# Altium PCB LAY-90818_A.brd.PcbDoc (part 3 of 6)
Units mil, origin at the board's own origin, x right, y up, seen from the top; angles counter-clockwise.
Board outline 4645.67 x 2165.35 mil, 4 copper layers (TOP, GND, POWER, BOTTOM), stack 60.45 mil thick; 414 components, 348 nets, 1441 pads, 720 vias.
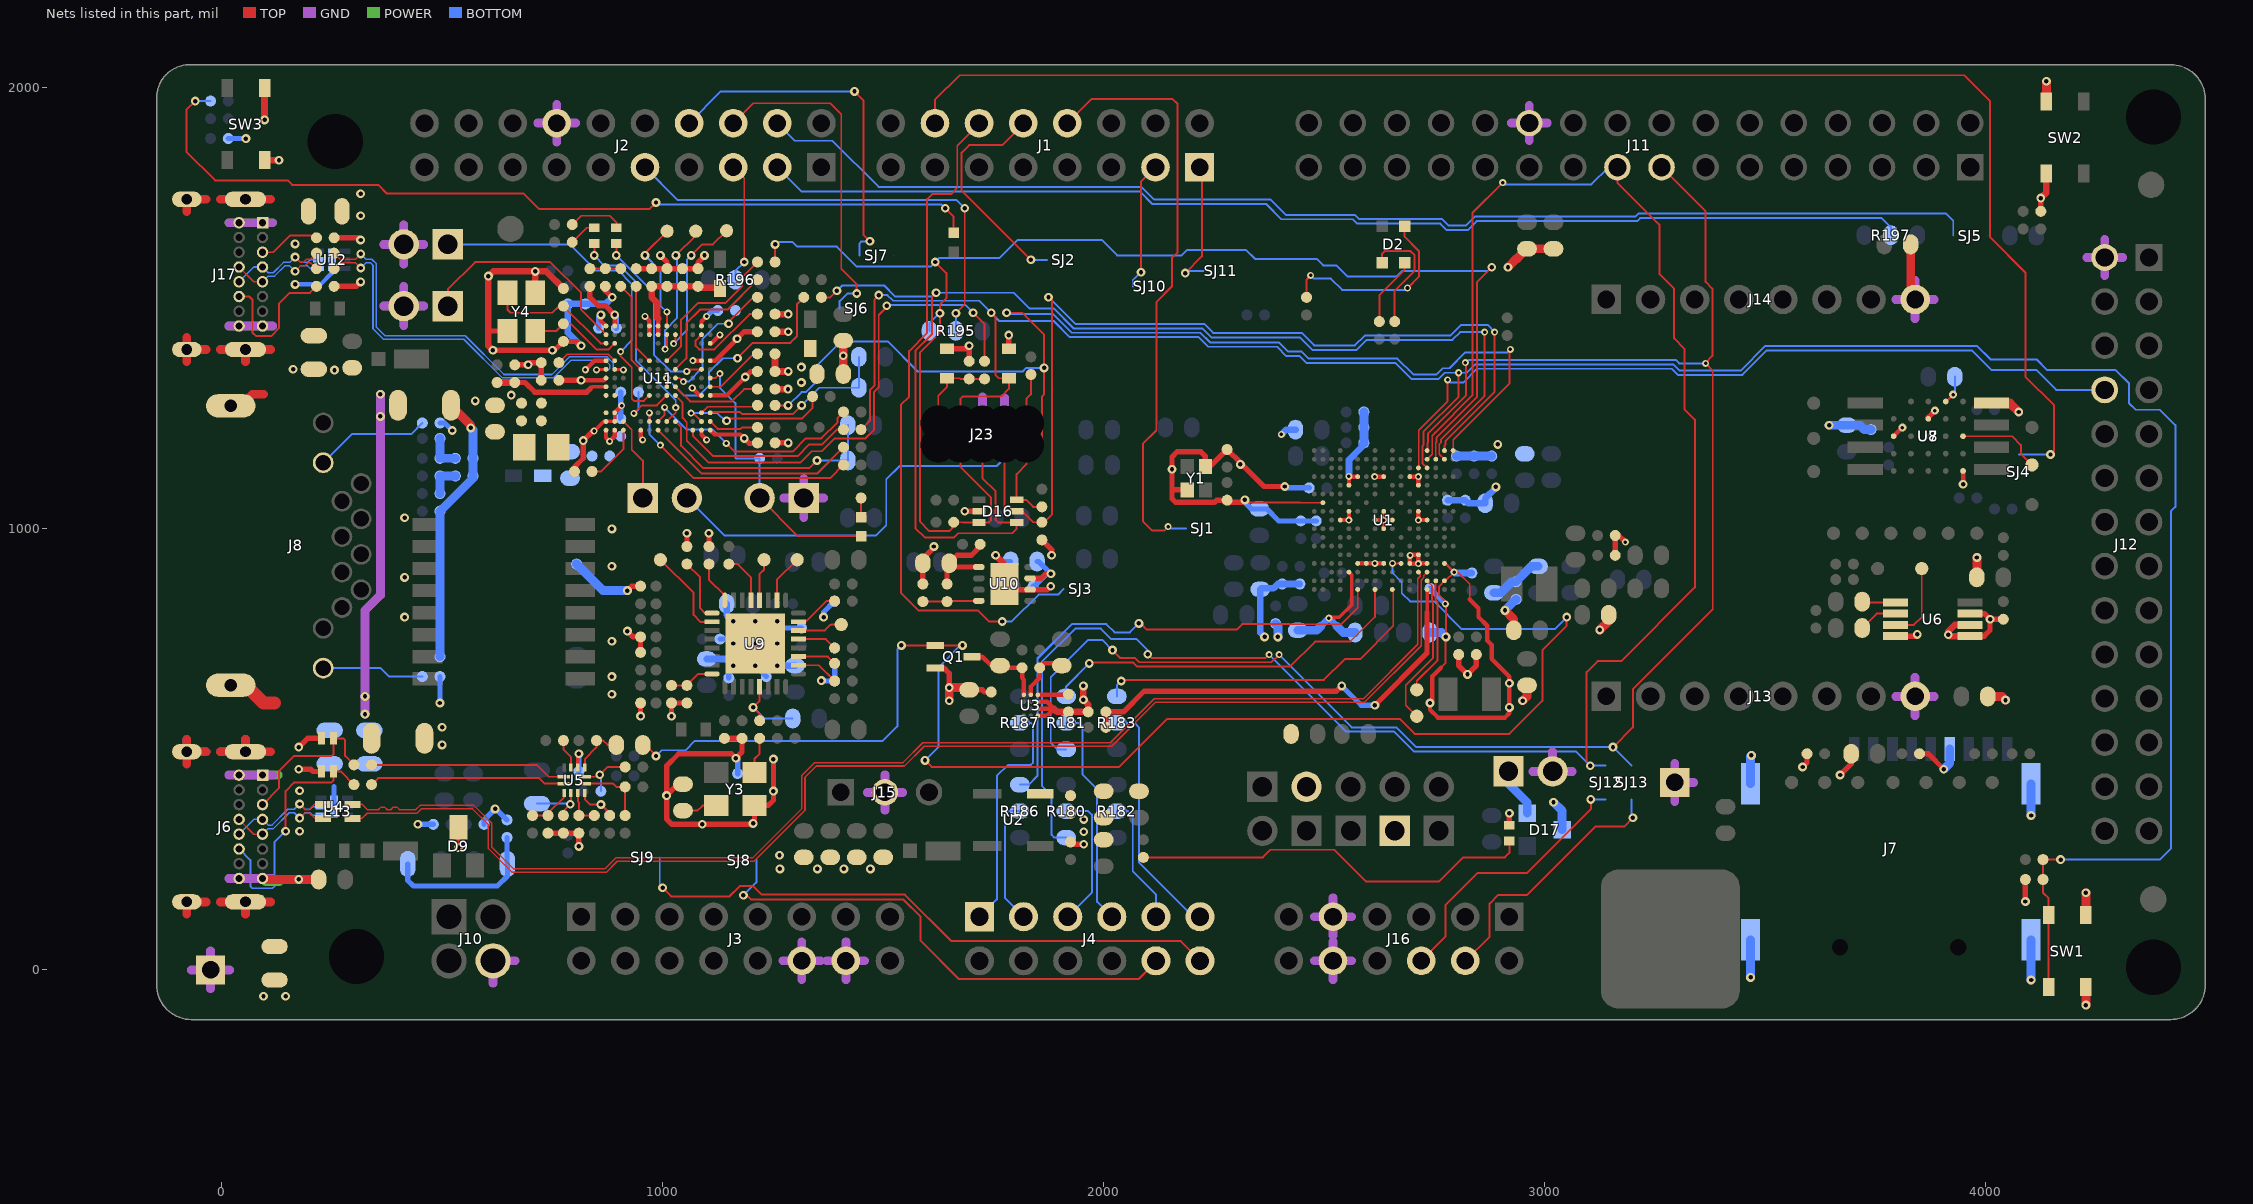
[diagram p5: the nets of this part, all layers, seen from the top]

## Via types
v1: diameter 20, hole 10, TOP to BOTTOM, 483 vias
v2: diameter 16, hole 8, TOP to BOTTOM, 215 vias
v3: diameter 18, hole 8, TOP to BOTTOM, 13 vias
v4: diameter 20, hole 10.1, TOP to BOTTOM, 9 vias

## Nets (pads, with @x,y where several pads share a name; then routed paths per layer and width w, separated by ;. In a path a pad name is that pad's centre, name@x,y a point inside that pad or via, vN(x,y) a via of type N, cw(c..) or ccw(c..) an arc to the next point about the centre after c; other vN are vias at no path point) (continued)
GND: C1.2 C2.2 C3.2 C4.2 C5.2 C6.2 C7.2 C8.2 C9.2 C10.2 C11.2 C12.2 C13.2 C14.2 C15.2 C16.2 C17.2 C18.2 C19.2 C21.2 C22.2 C23.2 C24.2 C27.2 C28.2 C29.2 C30.2 C31.2 C32.2 C33.2 C34.2 C35.2 C36.2 C37.2 C38.2 C39.2 C40.2 C41.2 C42.2 C43.2 C44.2 C45.2 C46.2 C47.2 C48.2 C49.2 C50.2 C51.2 C52.2 C53.2 C54.2 C55.2 C56.2 C57.2 C58.2 C60.2 C62.2 C63.2 C64.2 C65.2 C66.2 C67.2 C68.2 C70.2 C71.2 C72.2 C73.2 C74.2 C75.2 C76.2 C77.2 C78.2 C79.2 C80.2 C81.2 C82.2 C83.2 C84.2 C85.2 C86.2 C87.2 C88.2 C89.2 C90.2 C91.2 C92.2 C93.2 C94.2 C95.2 C96.2 C97.2 C99.2 C100.2 C101.2 C102.1 C103.1 C104.2 C105.2 C106.2 D5.C D7.1 D8.1 D9.3 D14.A D15.A D16.2 J2.14 J3.12 J3.14 J6.A1 J6.A12 J6.B1 J6.B12 J7.6 J7.G1 J7.G2 J7.G3 J7.G4 J10.4 J11.22 J12.2 J13.8 J14.8 J15.2 J16.9 J16.10 J17.A1 J17.A12 J17.B1 J17.B12 J18.2 J19.2 J21.1 J23.3 J23.5 JP1.1 JP2.1 JP6.2 Q1.1 R12.1 R21.2 R29.2 R33.2 R49.2 R50.2 R54.2 R66.2 R67.2 R68.2 R69.2 R82.2 R87.2 R88.2 R89.2 R90.2 R95.1 R96.1 R103.2 R107.2 R112.2 R113.2 R117.2 R118.2 R119.2 R120.2 R121.2 R122.2 R123.2 R135.2 R147.2 R154.2 R192.1 R193.1 R205.2 SW1.1 SW1.2 SW2.1 SW2.2 SW3.1 SW3.2 U1.D6 U1.D9 U1.D12 U1.E5 U1.E13 U1.G2 U1.H5 U1.H9 U1.H13 U1.J4 U1.J8 U1.J10 U1.J14 U1.K9 U1.N13 U1.P6 U1.P7 U1.P9 U1.P12 U1.P14 U1.P16 U1.T16 U2.2 U3.B3 U3.C3 U3.D3 U4.7 U5.10 U6.4 U6.5 U6.6 U6.7 U7.B3 U7.C1 U7.E5 U8.4 U9.33 U10.2 U10.9 U11.B1 U11.B5 U11.B9 U11.B13 U11.H1 U11.H2 U11.J13 U11.M11 U11.M12 U11.N1 U11.N5 U11.N12 U12.7 Y1.2 Y1.4 Y3.2 Y4.2 Y4.4 | length 15083.5
  TOP w4: 2445,1059.37 U1.G2@2497.2,1059.37 ; U1.T16@2772.8,882.2 2760.63,870 2760.63,849.37 2775,835 v2(2775,830) ; v2(2794.48,901.89) 2803.11,901.89 2830,875 2830,840
  TOP w4.4: v1(2320.4,1065.7) 2326.73,1059.37 2445,1059.37 ; 2764.91,685.22 2775,695.31 2775,749 2776,750 v1(2776,754.89) 2776,829 v2(2775,830) ; U1.T16@2772.8,882.2 2774.79,882.2 v2(2794.48,901.89)
  TOP w6: U1.P16@2772.8,921.57 2774.8,921.57 v2(2794.48,901.89)
  TOP w8: U5.10@807.87,458.54 807.87,487.87 v1(810,490) ; v2(844.68,1221.87) 866.28,1243.48 U11.N12@871.59,1243.48 U11.M12@891.28,1243.48 U11.M11@891.28,1263.16
  TOP w10: v2(825,1360.7) 845.57,1381.27 U11.N5@871.59,1381.27 ; v1(860,1485) 860,1471.55 871.54,1460.01 U11.N1@871.59,1460.01 ; U11.M11@891.28,1263.16 891.28,1263.47 v2(907.18,1279.37) ; U11.J13@950.33,1223.79 950.33,1206.22 v2(954.68,1201.87) ; v2(959.98,1481.87) 970.02,1471.83 U11.H1@970.02,1460.01 U11.H2@970.02,1440.33 ; v2(1067.18,1319.37) 1084.02,1302.53 U11.B9@1088.13,1302.53 ; v2(1068.58,1381.27) U11.B5@1088.13,1381.27 ; U11.B13@1088.13,1223.79 1088.13,1213.42 v2(1099.68,1201.87) ; U11.B1@1088.13,1460.01 1088.13,1470.32 v2(1099.68,1481.87) ; U3.D3@1850.75,576.38 1872.13,576.38 1887.64,591.89 ; U3.C3@1850.75,592.13 1850.99,591.89 1887.64,591.89 ; U3.B3@1850.75,607.87 1872.13,607.87 1887.64,592.36 1887.64,591.89 ; U1.J4@2536.57,1020 v2(2556.26,1020) U1.H5@2556.26,1039.69 ; U1.E5@2556.26,1098.74 v2(2556.26,1118.74) 2556.57,1118.43 U1.D6@2575.94,1118.43 ; U1.P6@2575.94,921.57 U1.P7@2595.63,921.57 v2(2615,921.57) U1.P9@2635,921.57 ; v2(2614.23,1118.43) U1.D9@2635,1118.43 ; U1.J8@2615.31,1020 v2(2635,1020) ; U1.K9@2635,1000.31 v2(2635,1020) ; U1.H9@2635,1039.69 v2(2635,1020) ; U1.J10@2654.69,1020 v2(2635,1020) ; U1.D12@2694.06,1118.43 2710.31,1118.43 2710.5,1118.24 v2(2713.74,1118.24) U1.E13@2713.74,1098.74 ; U1.H13@2713.74,1039.69 v2(2713.74,1020) U1.J14@2733.43,1020 ; U1.P14@2733.43,921.57 2714.05,921.57 v2(2713.74,921.26) ; 2764.91,685.22 2745,665.31 2745,610 v1(2740,605) 2740,590 2757.91,572.09 2910,572.09 2920,582.09 v1(2920,595) v1(2920,650) 2920,665 2880,705 2880,736.83 2870,746.83 2870,780 2850,800 2850,820 2830,840 ; U7.C1@3791.26,1210 v3(3810.94,1229.69) ; v1(3948.74,1101.26) U7.E5@3948.74,1131.26 ; v2(2713.74,921.26) 2694.37,921.26 U1.P12@2694.06,921.57 2694.06,939.1 v2(2695,940.05) 2696.22,941.26 U1.N13@2713.74,941.26 v2(2713.74,921.26)
  TOP w12: v1(175,455) 202.22,455 207.22,450 D7.1@226.22,450 ; v1(175,505) 195,525 D8.1@226.22,525 ; R113.2@255,1550 305,1550 v1(315,1560) ; R112.2@255,1660 310,1660 v1(315,1655) ; v1(537,277) D9.3@537,323.3 ; 605,1450 606.4,1448.6 Y4.2@648.21,1448.6 ; v1(615,1405) v1(750,1405) 755,1405 C96.2@775,1425 805,1425 v1(815,1415) ; R107.2@664.7,1371.9 v1(695,1371.9) 700,1376.9 R122.2@724.7,1376.9 C79.2@724.7,1336.9 ; R50.2@740,310 C40.2@775,310 R49.2@810,310 v1(810,280) ; R117.2@800,1130 800,1140 820,1160 v1(820,1200) 841.87,1221.87 v2(844.68,1221.87) ; C85.2@870,1550 870,1540 885,1524.99 v1(885.65,1524.99) ; v1(920,768) 933,755 C54.2@950,755 C57.2@950,720 ; v1(920,860) 930,870 C55.2@950,870 ; R123.2@940,1590 C88.2@975,1590 C87.2@1010,1590 ; v1(950,575.5) C56.2@950,605 ; v1(995,1620) 1010,1605 C87.2@1010,1590 ; v1(1020,575) R87.2@1020,605 C63.2@1055,605 ; R154.2@1046,421 1035,421 v1(1009,395) ; R68.2@1055,960 v1(1055,990) ; v1(1095,1620) 1095,1618.89 1080,1603.89 C89.2@1080,1590 C86.2@1045,1590 C87.2@1010,1590 ; R67.2@1105,960 v1(1105,990) ; R96.1@1140,525 R95.1@1180,525 1180,494 v1(1166,480) 1156,490 1036.51,490 1009,462.49 v1(1009,395) ; v1(1251.16,478) v1(1251.16,405.39) 1251.16,384.6 1239.16,372.6 Y3.2@1208.31,372.6 1208.31,335.4 v1(1205,332.1) 1202.9,330 v1(1090,330) 1021,330 1009,342 v1(1009,395) ; C77.2@1255,1195 v1(1285,1195) ; R103.2@1590,875 C64.2@1590,922 1590,932.89 1615,957.89 v1(1615,960) ; Q1.1@1618.27,684.41 1638,684.41 1650,672.41 v1(1650,640) ; D14.A@1645,1408.46 1688.46,1408.46 v1(1695,1415) R135.2@1695,1380 ; v1(1685,1040) D16.2@1717.28,1040 ; C37.2@1695,635 1725,635 1730,630 C38.2@1745,630 ; U10.9@1775,875 1787.8,862.21 U10.2@1833.07,862.21 1872.2,862.21 v1(1880,870) ; D15.A@1785,1408.46 v1(1785,1439.3) ; R147.2@1860,975 1882,953 v1(1882,940) ; C34.2@1925,290 1930,285 v1(1955,285) ; Y1.2@2189.33,1088.42 2156.57,1088.42 2155,1090 ; v1(2320.4,1065.7) 2314.7,1060 2285,1060 C2.2@2280,1065 2256.5,1065 2251.5,1060 2163.49,1060 2155,1068.49 2155,1090 ; v1(2410.66,1096) 2364,1096 2313.89,1146.11 v1(2310,1146.11) 2310,1150 C1.2@2280,1180 2241.57,1141.58 Y1.4@2230.67,1141.58 2230.67,1164.33 2220,1175 2167,1175 2155,1163 v1(2155,1135) 2155,1090 ; C100.2@2805,715 2805,690 v1(2825,670) 2845,690 C101.2@2845,715 ; D5.C@2920,327.72 v1(2920,355) ; C32.2@3160,940 C24.2@3160,985 3168.05,985 v2(3183.05,970) ; v1(3585,460) 3595,470 R54.2@3595,490 ; v1(3670,441.8) 3695,466.8 C42.2@3695,490 ; U6.4@3795.35,756.61 3840.91,756.61 v1(3845,760.7) ; C43.2@3850,490 3870,490 v1(3905,455) ; U7.B3@3870,1249.37 3870,1253 v3(3885,1268) ; U6.5@3964.65,756.61 3996.61,756.61 4010,770 v1(4010,795) ; U6.7@3964.65,807.79 3997.2,807.79 v1(4010,795) ; C44.2@4040,795 v1(4010,795) ; v1(4090,155) C3.2@4090,205 ; C4.2@4125,1720 v1(4125,1750)
  TOP w15: SW3.2@97.32,1835.94 v1(130,1835.94) ; v1(97.32,1927.32) SW3.1@97.32,1999.33 ; v1(615,1405) 605,1415 605,1450 v1(605,1573) 615.8,1583.8 v1(711.2,1583.8) ; Y4.4@711.2,1535.21 v1(711.2,1583.8) ; C97.2@775,1545 736.2,1583.8 v1(711.2,1583.8) ; R118.2@1254.7,1316.9 v1(1284.2,1316.9) ; R119.2@1254.7,1396.9 C80.2@1254.7,1356.9 v1(1284.7,1356.9) ; C76.2@1254.7,1446.9 v1(1284.7,1446.9) ; R120.2@1254.7,1486.9 v1(1284.7,1486.9) ; v1(1755,940) 1775,920 U10.9@1775,875 ; 1887.64,591.89 1894.53,585 R33.2@1920,585 R29.2@1965,585 1965,601.51 v1(1954.1,612.41) v1(1954.1,643.91) ; U6.5@3964.65,756.61 3918.39,756.61 v1(3915,760) 3915,767.2 3930,782.21 U6.6@3964.65,782.21 ; v1(4125,1750) 4137.68,1762.68 SW2.1@4137.68,1805.67
  TOP w20: J6.A12@92.72,207.23 94.94,205 v1(175,205) C39.2@220,205 ; C83.2@1409.7,1426.9 v1(1409.7,1392.4) 1409.7,1355.3 1410,1355 C84.2@1410,1351 ; v1(1650,610) v1(1650,640) 1690,640 C37.2@1695,635 ; v1(2910,815) 2930,795 C28.2@2930,770 ; v1(2916.8,1593.2) 2936.8,1613.2 2938.2,1613.2 C104.2@2960,1635 C105.2@3020,1635 ; v1(3125,770.86) 3145,790.86 C27.2@3145,805 ; C71.2@3830,1645 3830,1530.15 J14.8@3840.04,1520.11 ; C45.2@3980,890 v1(3980,935) ; C70.2@4005,620 4036.77,620 v1(4045,611.77) ; U8.4@4013,1285 4055,1285 v1(4075,1265) ; SW2.2@4137.68,1969.06 v1(4137.68,2015) ; v1(4227.32,-80) SW1.2@4227.32,-39.05 ; SW1.1@4227.32,124.33 v1(4227.32,175)
  GND w20: -68,0 JP1.1@-25,0 ; -25,-43 JP1.1@-25,0 ; -25,43 JP1.1@-25,0 ; 16.56,207.23 J6.B1@39.57,207.23 62.57,207.23 ; 16.56,441.48 J6.B12@39.57,441.48 62.57,441.48 ; 16.56,1459.87 J17.B1@39.57,1459.87 62.57,1459.87 ; 16.56,1694.12 J17.B12@39.57,1694.12 62.57,1694.12 ; 18,0 JP1.1@-25,0 ; 69.71,207.23 J6.A12@92.72,207.23 115.72,207.23 ; 69.71,441.48 J6.A1@92.72,441.48 115.72,441.48 ; 69.71,1459.87 J17.A12@92.72,1459.87 115.72,1459.87 ; 69.71,1694.12 J17.A1@92.72,1694.12 115.72,1694.12 ; 368.5,1505 J19.2@413,1505 ; 368.5,1645 J18.2@413,1645 ; 413,1460.5 J19.2@413,1505 ; 413,1549.5 J19.2@413,1505 ; 413,1600.5 J18.2@413,1645 ; 413,1689.5 J18.2@413,1645 ; 457.5,1505 J19.2@413,1505 ; 457.5,1645 J18.2@413,1645 ; 615.5,-29.5 J10.4@615.5,20.5 665.5,20.5 ; 717.5,1920 J2.14@760,1920 ; 760,1877.5 J2.14@760,1920 ; 760,1962.5 J2.14@760,1920 ; 802.5,1920 J2.14@760,1920 ; 1273,20.5 J3.12@1315.5,20.5 ; 1275.5,1070 J21.1@1320,1070 ; 1315.5,-22 J3.12@1315.5,20.5 ; 1315.5,63 J3.12@1315.5,20.5 ; 1320,1025.5 J21.1@1320,1070 ; 1320,1114.5 J21.1@1320,1070 ; 1358,20.5 J3.12@1315.5,20.5 ; 1364.5,1070 J21.1@1320,1070 ; 1373,20.5 J3.14@1415.5,20.5 ; 1415.5,-22 J3.14@1415.5,20.5 ; 1415.5,63 J3.14@1415.5,20.5 ; 1458,20.5 J3.14@1415.5,20.5 ; 1464,402.5 J15.2@1504,402.5 ; 1504,362.5 J15.2@1504,402.5 ; 1504,442.5 J15.2@1504,402.5 ; 1544,402.5 J15.2@1504,402.5 ; J23.5@1725,1240 1725,1299 ; J23.3@1775,1240 1775,1297 ; 2477.5,20.5 J16.10@2520,20.5 ; 2477.5,120.5 J16.9@2520,120.5 ; 2520,-22 J16.10@2520,20.5 ; 2520,63 J16.10@2520,20.5 ; 2520,78 J16.9@2520,120.5 ; 2520,163 J16.9@2520,120.5 ; 2562.5,20.5 J16.10@2520,20.5 ; 2562.5,120.5 J16.9@2520,120.5 ; 2925,1920 J11.22@2965,1920 ; 2965,1880 J11.22@2965,1920 ; 2965,1960 J11.22@2965,1920 ; 2973.5,450 JP6.2@3018,450 ; 3005,1920 J11.22@2965,1920 ; 3018,494.5 JP6.2@3018,450 ; 3062.5,450 JP6.2@3018,450 ; 3295,382 JP2.1@3295,425 ; 3295,468 JP2.1@3295,425 ; 3338,425 JP2.1@3295,425 ; 3796.54,620.11 J13.8@3840.04,620.11 ; 3796.54,1520.11 J14.8@3840.04,1520.11 ; 3840.04,576.6 J13.8@3840.04,620.11 ; 3840.04,663.61 J13.8@3840.04,620.11 ; 3840.04,1476.6 J14.8@3840.04,1520.11 ; 3840.04,1563.61 J14.8@3840.04,1520.11 ; 3883.55,620.11 J13.8@3840.04,620.11 ; 3883.55,1520.11 J14.8@3840.04,1520.11 ; 4229.5,1615.24 J12.2@4270,1615.24 ; 4270,1574.73 J12.2@4270,1615.24 ; 4270,1655.74 J12.2@4270,1615.24 ; 4310.5,1615.24 J12.2@4270,1615.24
  POWER w20: 16.56,1459.87 J17.B1@39.57,1459.87 62.57,1459.87 ; 16.56,1694.12 J17.B12@39.57,1694.12 62.57,1694.12 ; J6.B1@39.57,207.23 J6.A12@92.72,207.23 99.94,200 130,200 ; J6.B12@39.57,441.48 J6.A1@92.72,441.48 128.52,441.48 ; 69.71,1459.87 J17.A12@92.72,1459.87 115.72,1459.87 ; 69.71,1694.12 J17.A1@92.72,1694.12 115.72,1694.12 ; 368.5,1505 J19.2@413,1505 ; 368.5,1645 J18.2@413,1645 ; 413,1460.5 J19.2@413,1505 ; 413,1549.5 J19.2@413,1505 ; 413,1600.5 J18.2@413,1645 ; 413,1689.5 J18.2@413,1645 ; 457.5,1505 J19.2@413,1505 ; 457.5,1645 J18.2@413,1645
  BOTTOM w10: v1(166.68,1554.16) 224.16,1554.16 250,1580
  BOTTOM w12: C5.2@15,1885 v1(55,1885) ; 250,1580 U12.7@250,1610 ; U4.7@255,370 255,415 ; v1(445,330) C66.2@480,330 ; v1(495,605) R69.2@495,665 ; R66.2@495,1240 506,1240 v1(523,1223) ; C68.2@595,330 595,340 v1(620,365) 622,365 C67.2@647,340 ; C41.2@810,450 v1(810,490) ; C81.2@855,1455 855,1480 v1(860,1485) ; C94.2@905,1250 905,1277.19 v2(907.18,1279.37) 905,1281.55 R121.2@905,1310 ; v2(1099.68,1481.87) 1112.81,1495 C82.2@1125,1495 ; C52.2@1130,750 1150,750 v4(1160,740) ; C51.2@1150,662 1150,680 v4(1160,690) ; v1(1166,480) 1170,476 C58.2@1170,445 ; v4(1210,690) C48.2@1235,665 ; v4(1260,790) 1275,775 C53.2@1315,775 ; v1(1360,655.81) 1364.19,655.81 1365,655 R90.2@1390,655 R88.2@1390,695 ; v1(1365,800) 1365,811 R89.2@1390,836 ; v1(1755,940) 1769,926 C65.2@1789,926 ; v1(2320.4,1065.7) 2320.4,1059.6 2335,1045 C10.2@2353,1045 2370,1045 2397,1018 C12.2@2447,1018 C11.2@2482,1018 ; v1(2410.66,1096) 2413.66,1093 C30.2@2466,1093 ; C29.2@2740,865 v2(2775,830)
  BOTTOM w15: v1(815,1415) 785,1445 C106.2@785,1510 R205.2@825,1510 870.66,1510 v1(885.65,1524.99) ; C50.2@1100,705 1145,705 v4(1160,690) ; C62.2@1145,830 1145,805 v4(1160,790) ; v4(1260,690) C49.2@1300,690 ; v1(2365,755) 2355,765 C17.2@2355,863 2357,865 2385,865 2395,875 C19.2@2405,875 C18.2@2445,875 ; v2(2403,1214) 2414,1225 C13.2@2435,1225 ; v2(2556.26,1118.74) 2556.26,1156.26 2585,1185 2585,1190 C15.2@2590,1195 ; C23.2@2780,1065 C22.2@2820,1065 2827,1058 C21.2@2865,1058 2865,1068.61 2889.5,1093.1 v1(2889.5,1095) ; v2(2794.48,901.89) 2796.37,900 C31.2@2835,900
  BOTTOM w20: C99.2@805,920 865,860 v1(920,860) ; C15.2@2590,1195 C14.2@2590,1230 C16.2@2590,1265 ; R12.1@2740,765 2765.89,765 v1(2776,754.89) ; C9.2@2800,1165 C8.2@2840,1165 C7.2@2880,1165 ; v1(2910,815) R21.2@2935,840 ; v1(3467.09,-17.09) J7.G4@3467.09,67.87 ; J7.G2@3467.09,422.2 3467.09,484.48 v1(3468.8,486.2) ; v1(3645,1235) C46.2@3685,1235 3715,1235 3725,1225 C47.2@3740,1225 ; v1(3905,455) 3918.66,468.66 J7.6@3918.66,500.94 ; v1(4102.91,-22.91) J7.G3@4102.91,67.87 ; v1(4102.91,350) J7.G1@4102.91,422.2
  other v1: 95,-60 145,-60 1266,228.93 1351,228.93 1411,228.93 1471,228.93 1265,260 1955,313 176.68,314.16 1955,341 176.68,406.16 500,510 500,550 885,625 885,665 885,745 415,800 415,890 885,915 885,1000 415,1025 2893.5,1191.6 575,1290 656.92,1303.38 256,1360 162,1362 166.68,1646.16 315,1710 315,1760
  other v4: 1210,740 1260,740 1210,790
GND_ENET: C60.1 C61.2 J8.S1 J8.S2 R82.1 | length 940.4
  TOP w20: J8.S2@20.9,1278.78 43.78,1278.78 70,1305 95,1305
  TOP w30: J8.S1@20.9,645.71 54.29,645.71 95,605 120,605
  GND w20: v1(325,580) v1(325,620) 325,815 360,850 v1(360,1255) v1(360,1305)
HS_USB_CC1: D8.2 J6.A5 R48.1 | length 358.5
  TOP w4.4: J6.A5@92.72,374.55 130,411.84 130,450 165,485 249.38,485 253.78,489.4 D8.2@253.78,525 275.6,525 280,520.6 280,485 R48.1@300,465
HS_USB_CC2: D7.2 J6.B5 R47.1 | length 578.3
  TOP w4.4: v1(145.18,314.16) 145.18,405.18 165,425 249.38,425 253.78,429.4 D7.2@253.78,450 270,450 R47.1@300,420
  BOTTOM w4.4: J6.B5@39.57,274.16 65,248.72 65,189.4 69.4,185 115,185 120,190 120,290 144.16,314.16 v1(145.18,314.16)
HS_USB_DN: J6.A7 J6.B7 L13.1 U4.1 | length 294.8
  TOP w3.5: J6.B7@39.57,341.09 73.03,307.62 J6.A7@92.72,307.62 ; v1(176.68,344.16) 187.87,355.35 199.65,355.35 211.5,343.5 L13.1@230,343.5
  BOTTOM w3.5: J6.A7@92.72,307.62 105.55,320.45 117.48,320.45 153.23,356.2 164.64,356.2 v1(176.68,344.16) 188.78,356.26 199.89,356.26 205.83,350.31 U4.1@225.08,350.31
HS_USB_DP: J6.A6 J6.B6 L13.4 U4.2 | length 295.6
  TOP w3.5: v1(176.68,376.16) 189.68,363.15 198.15,363.15 210,375 L13.4@230,375
  BOTTOM w3.5: J6.B6@39.57,307.62 73.03,341.09 J6.A6@92.72,341.09 105.55,328.25 114.25,328.25 150,364 164.52,364 v1(176.68,376.16) 188.78,364.06 199.89,364.06 205.83,370 U4.2@225.08,370
HS_USB_ID: Q1.2 R44.2 U1.P11 | length 3464.1
  TOP w4: v2(2655,921.57) U1.P11@2674.37,921.57
  TOP w4.4: R44.2@955,510 960,510 v1(985,485) ; v1(1541.33,735.59) Q1.2@1618.27,735.59 v1(1680,735.59) ; v1(1595,475) 1610,460 2035,460 2144.05,569.05 2670.95,569.05 2705,535 2920,535 2995,610 2995,725 3050,780 v1(3050,800)
  BOTTOM w4: v2(2655,921.57) 2655,900 2676,879
  BOTTOM w4.4: v1(985,485) 998,498 1052,498 1073.1,519.1 1499.1,519.1 1532.16,552.16 1532.16,726.42 v1(1541.33,735.59) ; v1(1595,475) 1626,506 1626,686.59 1675,735.59 v1(1680,735.59) ; 2676,879 2676,854 2694.7,835.3 2749.62,835.3 2812.42,772.5 3022.5,772.5 v1(3050,800)
LDO_3V3: C35.1 C36.1 R25.1 U2.5
LPC_DBGIF_DETECT: R134.1 U11.E9 | length 1206.9
  TOP w4.4: U11.E9@1029.07,1302.53 1045.18,1286.42 1045.18,1251.38 1054.68,1241.87 1054.68,1200.19 1104.88,1150 1312,1150 1338,1176 1361,1176 1390,1205 1460,1205 1479.7,1224.7 1479.7,1310.56 1490,1320.86 1490,1484.9 1508.12,1503.02 v1(1508.12,1505.83) ; v1(1704,1490) 1730,1464 R134.1@1730,1380
  BOTTOM w4.4: v1(1508.12,1505.83) 1510.93,1505.83 1512.3,1507.2 1686.8,1507.2 v1(1704,1490)
LPC_DBGIF_ISP0_CTRL: R133.1 U11.C13 | length 398.1
  TOP w4.4: U11.C13@1068.44,1223.79 1068.44,1211.19 1114.63,1165 1305.86,1165 1331.71,1190.86 1360.86,1190.86 1395,1225 R133.1@1410,1225
LPC_DBGIF_RESET: R132.1 U11.E6 | length 316.9
  TOP w4.4: U11.E6@1029.07,1361.59 1053.99,1386.51 1053.99,1466.21 1085.15,1497.37 1147.37,1497.37 R132.1@1215,1565
LPC_DBGIF_TCK_SWCLK: J22.1 U11.L12 | length 191.7
  TOP w4.4: U11.L12@910.96,1243.48 930,1224.44 930,1179.74 955,1154.74 J22.1@955,1070
LPC_DBGIF_TDI: R131.1 U11.F5 | length 345.3
  TOP w4.4: U11.F5@1009.39,1381.27 1042.07,1413.95 1042.07,1474.26 1079.7,1511.89 1141.88,1511.89 1180,1550 1180,1570 R131.1@1215,1605
LPC_DBGIF_TDO_SWO: R130.1 U11.F8 | length 499.2
  TOP w4.4: U11.F8@1009.39,1322.22 v2(1009.38,1341.67) ; v1(1169.68,1386.87) 1204.68,1421.87 1289.68,1421.87 1304.68,1436.87 1304.68,1509.68 R130.1@1320,1525
  BOTTOM w4.4: v2(1009.38,1341.67) 1049.18,1301.87 1081.87,1301.87 1105,1325 1105,1355 1136.87,1386.87 v1(1169.68,1386.87)
LPC_DBGIF_TMS_SWDIO: R129.1 U11.B11 | length 133.8
  TOP w4.4: U11.B11@1088.13,1263.16 1101.82,1276.86 1211.86,1276.86 R129.1@1215,1280
LPC_HW_VER_0: R118.1 U11.E8 | length 211
  TOP w4.4: U11.E8@1029.07,1322.22 1062.32,1288.97 1156.78,1288.97 1184.72,1316.9 R118.1@1214.7,1316.9
LPC_HW_VER_1: R119.1 U11.A8 | length 137.8
  TOP w4.4: U11.A8@1107.81,1322.22 1132.22,1322.22 1206.9,1396.9 R119.1@1214.7,1396.9
LPC_HW_VER_2: R121.1 U11.F9 | length 144.5
  TOP w4.4: v2(935,1262) 953,1280 965,1280 986.85,1280 U11.F9@1009.39,1302.53
  BOTTOM w4.4: v2(935,1262) 937,1262 945,1270 R121.1@945,1310
LPC_HW_VER_3: R120.1 U11.B2 | length 207.5
  TOP w4.4: U11.B2@1088.13,1440.33 1074.72,1426.92 1074.72,1426.33 1074.63,1426.22 1074.63,1415.02 1082.72,1406.92 1117.35,1406.92 1197.33,1486.9 R120.1@1214.7,1486.9
LPC_HW_VER_4: R122.1 U11.M5 | length 140.5
  TOP w4.4: R122.1@764.7,1376.9 783.67,1395.87 876.68,1395.87 U11.M5@891.28,1381.27
LPC_HW_VER_5: R123.1 U11.H5 | length 181.6
  TOP w4.4: R123.1@940,1550 939.43,1549.43 939.43,1411.86 U11.H5@970.02,1381.27
LPC_HW_VER_6: J18.1 U11.H9 | length 782.6
  TOP w4.4: v2(904.68,1401.87) 904.68,1391.88 930,1366.56 930,1295 935,1290 957.48,1290 U11.H9@970.02,1302.53
  BOTTOM w4.4: J18.1@513,1645 789,1645 848,1586 899.12,1586 930,1555.12 930,1427.19 v2(904.68,1401.87)
LPC_HW_VER_7: J19.1 U11.N2 | length 512.8
  TOP w4.4: J19.1@513,1505 513,1543 575,1604.99 745,1604.99 815,1535 815,1496.92 U11.N2@871.59,1440.33
LPC_HW_VER_8: R117.1 U11.L13 | length 134.9
  TOP w4.4: R117.1@840,1130 860,1130 910.96,1180.96 U11.L13@910.96,1223.79
LPC_LED_USB_COMM: D10.C U11.F12 | length 508.8
  TOP w4.4: v1(845,1620) D10.C@845,1647.28 ; U11.F12@1009.39,1243.48 1029.68,1263.77 v2(1029.68,1275)
  BOTTOM w4: 979.68,1341.87 1029.68,1291.87 v2(1029.68,1275)
  BOTTOM w4.4: v1(845,1620) 868,1597 902.26,1597 940,1559.26 940,1381.56 979.68,1341.87
LPC_LED_VCOM_ACT: D12.C U11.B6 | length 413.4
  TOP w4.4: v1(895,1620) D12.C@895,1647.28 ; v2(1054.68,1356.87) 1059.39,1361.59 U11.B6@1088.13,1361.59
  BOTTOM w4.4: v1(895,1620) 980,1535 980,1395 1018.13,1356.87 v2(1054.68,1356.87)
LPC_MCU_LINK_I2C0_SCL: R143.1 U11.A12 | length 115.4
  TOP w4.4: U11.A12@1107.81,1243.48 1124.49,1226.8 1176.8,1226.8 1180,1230 R143.1@1215,1230
LPC_MCU_LINK_I2C0_SDA: R142.1 U11.E7 | length 309.3
  TOP w4.4: U11.E7@1029.07,1341.9 1038.76,1341.9 v2(1046.85,1333.82) ; v1(1149.68,1465) 1149.68,1469.68 1205,1525 R142.1@1215,1525
  BOTTOM w4.4: v2(1046.85,1333.82) 1046.9,1333.87 1058.87,1333.87 1090,1365 1090,1430 1125,1465 v1(1149.68,1465)
LPC_MCU_LINK_RX: R172.1 R178.1 U11.E12 | length 546.9
  TOP w4.4: U11.E12@1029.07,1243.48 1042.07,1230.48 1042.07,1188.06 1092.63,1137.5 1332.5,1137.5 v1(1350,1155)
  BOTTOM w4.4: v1(1350,1155) R172.1@1420,1155 R178.1@1420,1235
LPC_MCU_LINK_SPI1_MISO: R139.1 U11.G13 | length 486.1
  TOP w4.4: U11.G13@989.7,1223.79 1088.49,1125 1350,1125 R139.1@1410,1185
LPC_MCU_LINK_SPI1_MOSI: R138.1 U11.H12 | length 561.3
  TOP w4.4: U11.H12@970.02,1243.48 v2@970.02,1261.93 ; v2(969.98,1262.97) v2@969.98,1261.97 ; v2(995,1190) 1070,1115 1380,1115 R138.1@1410,1145 ; v2@969.98,1261.97 v2@970.02,1261.93
  BOTTOM w4.4: v2(969.98,1262.97) 969.98,1215.02 v2(995,1190)
LPC_MCU_LINK_SPI1_SCLK: R137.1 U11.G12 | length 528.9
  TOP w4.4: U11.G12@989.7,1243.48 1004.68,1258.45 v2(1004.7,1275.63) ; v2(1144.28,1193.87) 1163.15,1175 1295,1175 1325,1205 1360,1205 1396.07,1241.07 1396.07,1251.07 R137.1@1410,1265
  BOTTOM w4.4: v2(1004.7,1275.63) 1004.7,1274.93 1054.63,1225 1113.15,1225 v2(1144.28,1193.87)
LPC_MCU_LINK_SPI1_SSEL: R136.1 U11.B12 | length 351.7
  TOP w4.4: v2(1064.53,1262.59) 1069.01,1262.59 U11.B12@1088.13,1243.48 ; v1(1145,1245) 1150,1250 1315,1250 1340,1275 R136.1@1340,1300
  BOTTOM w4.4: v2(1064.53,1262.59) 1123.96,1262.59 1141.55,1245 v1(1145,1245)
LPC_MCU_LINK_TX: R173.1 R179.1 U11.A11 | length 434.9
  TOP w4.4: U11.A11@1107.81,1263.16 1109.65,1265 1175,1265 1180,1260 1295,1260 v1(1315,1280)
  BOTTOM w4.4: v1(1315,1280) 1355,1320 R173.1@1445,1320 R179.1@1445,1390
LPC_PIO0_5-ISP_EN-LED_SWD_ACT: D11.C J21.2 R124.2 U11.A7 | length 642.4
  TOP w4.4: U11.A7@1107.81,1341.9 1119.71,1341.9 v2(1129.68,1351.87) ; J21.2@1220,1070 1306.65,983.35 D11.C@1450,983.35
  BOTTOM w4.4: v2(1129.68,1351.87) 1129.68,1320.32 1165,1285 1165,1161.65 1166.65,1160 R124.2@1220,1160 J21.2@1220,1070
LPC_PIO0_10-SWO: TP28.1 U11.F2 | length 333
  TOP w4.4: v2(1005.5,1407.4) 1009.39,1411.29 U11.F2@1009.39,1440.33 ; v1(1030,1620) 1075,1665 TP28.1@1075,1675
  BOTTOM w4.4: v2(1005.5,1407.4) 1005.5,1450.5 1032.5,1477.5 1032.5,1617.5 v1(1030,1620)
LPC_PIO0_11-SWDCLK: TP29.1 U11.F1 | length 256.2
  TOP w4.4: v1(960,1620) 960,1625 TP29.1@1010,1675 ; U11.F1@1009.39,1460.01 v2(1009.39,1491.87)
  BOTTOM w4.4: v1(960,1620) 995,1585 995,1506.26 v2(1009.39,1491.87)
LPC_PIO0_12-SWDIO: TP30.1 U11.E2 | length 341.3
  TOP w4.4: v2(1025,1420.23) 1029.07,1424.31 U11.E2@1029.07,1440.33 ; v1(1065,1620) 1090,1645 1114,1645 TP30.1@1145,1676
  BOTTOM w4.4: v2(1025,1420.23) 1055,1450.23 1055,1610 v1(1065,1620)
LPC_USB1_DM: R110.2 U11.N6 | length 916.3
  TOP w3.5: R110.2@255,1590 268.6,1603.6 303.4,1603.6 v1(315.5,1591.5)
  TOP w7: v2(850,1360.48) 850.7,1360.48 851.8,1361.59 U11.N6@871.59,1361.59
  BOTTOM w3.5: v1(315.5,1591.5) 327.6,1603.6 337.4,1603.6 343.2,1597.8 343.2,1453.77 366.97,1430 549,1430 552.5,1426.5 636.8,1342.2 752.2,1342.2 792.2,1382.2 869.8,1382.2 880.49,1371.51 880.49,1363.98 876.99,1360.48 v2(850,1360.48)
LPC_USB1_DP: R111.2 U11.M6 | length 919.1
  TOP w3.5: R111.2@255,1625 268.6,1611.4 303.4,1611.4 v1(315.5,1623.5)
  TOP w7: U11.M6@891.28,1361.59 908.98,1361.59 910.08,1360.49 v2(910.78,1360.49)
  BOTTOM w3.5: v1(315.5,1623.5) 327.6,1611.4 340.63,1611.4 351,1601.03 351,1457 370.2,1437.8 552.23,1437.8 640.03,1350 748.97,1350 788.97,1390 873.03,1390 888.29,1374.74 888.29,1363.99 891.79,1360.49 v2(910.78,1360.49)
MCU_LINK_3V3: C76.1 C77.1 C79.1 C80.1 C81.1 C82.1 C84.1 L9.2 R116.1 U11.A3 U11.A5 U11.A9 U11.A13 U11.M1 U11.N7 | length 677.4
  TOP w10: v1(815,1336.88) 866.57,1336.88 U11.N7@871.59,1341.9 ; U11.M1@891.28,1460.01 v1(891.28,1485) ; U11.A13@1107.81,1223.79 1117.6,1214 1176,1214 v1(1185,1205) ; U11.A9@1107.81,1302.53 1145.34,1302.53 v1(1187.18,1344.37) ; U11.A5@1107.81,1381.27 1119.12,1381.27 v1(1168.92,1431.08) ; U11.A3@1107.81,1420.64 1110.64,1420.64 v2(1130,1440)
  TOP w12: C79.1@764.7,1336.9 808.1,1336.9 v1(815,1336.88) ; R116.1@835,1550 835,1525 854,1506 870.28,1506 v1(891.28,1485) ; v1(1168.92,1431.08) 1184.74,1446.9 C76.1@1214.7,1446.9 ; v1(1185,1205) 1196.51,1193.49 1213.49,1193.49 C77.1@1215,1195 ; v1(1187.18,1344.37) 1199.71,1356.9 C80.1@1214.7,1356.9
  BOTTOM w12: v1(891.28,1485) 895,1481.28 C81.1@895,1455
  other v1: 1314.68,1331.87 1314.68,1366.87
MCU_LINK_RST: R189.1 U11.J6 | length 207.2
  TOP w4.4: R189.1@905,1550 929.43,1525.57 929.43,1382.49 U11.J6@950.33,1361.59
MCU_LINK_USB_CC1: J17.A5 R112.1 | length 140
  TOP w4.4: J17.A5@92.72,1627.19 117.19,1627.19 155,1665 210,1665 R112.1@215,1660
MCU_LINK_USB_CC2: J17.B5 R113.1 | length 335.6
  TOP w4.4: J17.B5@39.57,1526.8 63.2,1526.8 70,1520 70,1445 78,1437 112,1437 130,1455 130,1510 155,1535 200,1535 R113.1@215,1550
MCU_LINK_USB_DN: J17.A7 J17.B7 R110.1 U12.1 | length 283.8
  TOP w3.5: J17.B7@39.57,1593.73 73.03,1560.27 J17.A7@92.72,1560.27 ; v1(166.68,1584.16) 178.78,1596.26 188.26,1596.26 195.6,1603.6 201.4,1603.6 R110.1@215,1590
  BOTTOM w3.5: J17.A7@92.72,1560.27 105.55,1573.1 120.1,1573.1 143.26,1596.26 154.58,1596.26 v1(166.68,1584.16) 178.78,1596.26 194.89,1596.26 200.83,1590.32 U12.1@220.08,1590.32
MCU_LINK_USB_DP: J17.A6 J17.B6 R111.1 U12.2 | length 283.8
  TOP w3.5: v1(166.68,1616.16) 178.78,1604.06 185.03,1604.06 192.37,1611.4 201.4,1611.4 R111.1@215,1625
  BOTTOM w3.5: J17.B6@39.57,1560.27 73.03,1593.73 J17.A6@92.72,1593.73 105.55,1580.9 116.86,1580.9 140.03,1604.06 154.58,1604.06 v1(166.68,1616.16) 178.78,1604.06 194.89,1604.06 200.83,1610 U12.2@220.08,1610
MCU_LINK_VBAT: C93.1 C94.1 C95.1 L12.2 U11.M13 U11.N13 | length 59.2
  TOP w10: U11.N13@871.59,1223.79 871.59,1206.36 v2(879.68,1198.27) 891.28,1209.87 U11.M13@891.28,1223.79
MCU_LINK_VDDA: C86.1 C87.1 C88.1 C89.1 L10.2 U11.G1 U11.G2 | length 273.5
  TOP w10: U11.G2@989.7,1440.33 U11.G1@989.7,1460.01 989.7,1476.92
  TOP w15: 989.7,1476.92 987.89,1478.74 987.89,1512.11 975,1525 C88.1@975,1550 C87.1@1010,1550 C86.1@1045,1550 C89.1@1080,1550 1083.28,1546.72 1129,1546.72 1130,1545.72 L10.2@1130,1544.72
MCU_LINK_XTAL_N: C96.1 U11.M3 Y4.3 | length 216.5
  TOP w4.4: Y4.3@711.2,1448.6 758.6,1448.6 C96.1@775,1465 791.34,1465.03 849.77,1406.94 877.58,1406.94 U11.M3@891.28,1420.64
MCU_LINK_XTAL_P: C97.1 U11.N3 Y4.1 | length 305.8
  TOP w4.4: Y4.1@648.21,1535.21 648.21,1496.8 655,1490 750,1490 765,1505 C97.1@775,1505 859.36,1420.64 U11.N3@871.59,1420.64
MCX_USB1_DM: L13.2 U1.R14 | length 2952.5
  TOP w3.5: L13.2@296.93,343.5 318.5,343.5 330.2,355.2 443,355.2 452.8,365 568.97,365 605,328.97 605,275 659,221 872.03,221 897.03,246 1207.03,246 1322.8,361.77 1322.8,436.77 1348.23,462.2 1548.23,462.2 1593.23,507.2 2018.23,507.2 2118.23,607.2 2592.2,607.2 2720,735 2720,883.55 2725.85,889.4 2725.85,894.31 U1.R14@2733.43,901.89
MCX_USB1_DP: L13.3 U1.R13 | length 2948.3
  TOP w3.5: L13.3@296.93,375 318.68,375 330.68,363 355.38,363 361.38,369 369.38,369 375.38,363 383.38,363 389.38,369 397.38,369 403.38,363 439.77,363 449.57,372.8 572.2,372.8 612.8,332.2 612.8,278.23 662.23,228.8 868.8,228.8 893.8,253.8 1203.8,253.8 1315,365 1315,440 1345,470 1545,470 1590,515 2015,515 2115,615 2588.97,615 2712.2,738.23 2712.2,886.78 2718.05,892.63 2718.05,897.58 U1.R13@2713.74,901.89
MCX_USB1_VBUS: R27.2 R29.1 U1.U14 | length 999.5
  TOP w8: 2733.43,811.28 U1.U14@2733.43,862.52
  TOP w12: R27.2@2005,550 R29.1@2005,585 2045,585 2092,632 2528,632 v1(2540,644) ; v1(2615.12,599.87) 2733.43,718.18 2733.43,811.28
  BOTTOM w12: v1(2540,644) 2584.13,599.87 v1(2615.12,599.87)
N17070141: TP6.1 U6.3 | length 177
  TOP w4.4: U6.3@3795.35,782.21 3837.2,782.21 3855,800 TP6.1@3855,910
N17947336: R17.2 R21.1 R194.2 | length 124.9
  BOTTOM w20: R194.2@2885,855 2900,855 2925,880 R21.1@2935,880 2970,915 R17.2@2985,915
N17976562: J26.2 L1.1 R152.2 | length 32.1
  BOTTOM w20: L1.1@2390,785 2395,780 v1(2395,755)
N18081997: R61.2 U7.A4 | length 65.3
  TOP w4.4: U7.A4@3909.37,1288.74 3910.24,1288.74 v3(3926,1304.5)
  BOTTOM w4.4: v3(3926,1304.5) 3930,1308.5 R61.2@3930,1345
N18146165: R55.2 U6.1 | length 76
  TOP w4.4: R55.2@3720,835 3721.61,833.39 U6.1@3795.35,833.39
N18146192: R56.2 U6.2 | length 88.9
  TOP w4.4: R56.2@3720,775 3752.8,807.79 U6.2@3795.35,807.79
N18170113: TP7.1 U7.C5 | length 194.9
  TOP w4.4: U7.C5@3948.74,1210 4060,1210 4080,1190 4080,1170 TP7.1@4105,1145
N18244965: J1.8 SJ1.2 | length 1368.2
  TOP w4.4: J1.8@1917.5,1920 1972.5,1975 2155.86,1975 2167.5,1963.36 2167.5,1627.5 2155,1615 2155,1550.01 2120,1515.01 2120,1224.14 2088.8,1192.94 2088.8,1017.29 2110.09,996 2137,996 v2(2146,1005)
  BOTTOM w4.4: v2(2146,1005) 2150,1001 SJ1.2@2186.5,1001
N18244998: J1.10 SJ2.2 | length 513.2
  TOP w4.4: J1.10@1817.5,1920 1817.5,1917.5 1770,1870 1695,1870 1678,1853 1678,1767 v1(1835,1610)
  BOTTOM w4.4: v1(1835,1610) SJ2.2@1871.5,1610
N18245035: J1.12 SJ3.2 | length 1590.7
  TOP w4.4: J1.12@1717.5,1920 1717.5,1918.5 1668,1869 1668,1773 1653.89,1758.89 1611.12,1758.89 1599.8,1747.57 1599.8,1444.23 1558.8,1403.23 1558.8,1299.66 1540,1280.86 1540,855 1579.7,815.3 1714.7,815.3 1740,790 v1(1770,790)
  BOTTOM w4.4: v1(1770,790) 1791.3,790 1852.3,851 1896.5,851 SJ3.2@1909.5,864
N18245072: J1.14 SJ4.2 | length 3429.6
  TOP w4.4: J1.14@1617.5,1920 1617.5,1972.5 1673.6,2028.6 3951.4,2028.6 4010,1970 4010,1661.28 4090,1581.28 4090,1345 4155.2,1279.8 4155.2,1176.7 v1(4147,1168.5)
  BOTTOM w4.4: SJ4.2@4075,1168.5 v1(4147,1168.5)
N18245211: J2.4 SJ5.2 | length 2814.1
  BOTTOM w4.4: J2.4@1260,1920 1300,1880 1385,1880 1489.8,1775.2 2085.65,1775.2 2114.26,1746.6 2378.4,1746.6 2412.94,1712.06 2569.26,1712.06 2579.12,1702.2 2767.8,1702.2 2782.4,1687.6 2821.37,1687.6 2841.57,1707.8 3205.4,1707.8 3212.2,1714.6 3910.4,1714.6 3926.5,1698.5 SJ5.2@3926.5,1665
N18245248: J2.6 SJ6.2 | length 757
  TOP w4.4: J2.6@1160,1920 1205,1965 1380,1965 1405,1940 1405,1590 1440,1555 v1(1440,1533.6)
  BOTTOM w4.4: SJ6.2@1401.5,1500 1401.5,1516.5 1418.6,1533.6 v1(1440,1533.6)
N18245285: J2.8 SJ7.2 | length 812
  TOP w4.4: v1(1435,1991.8) 1455,1971.8 1455,1666.98 v1(1470,1651.98)
  BOTTOM w4.4: J2.8@1060,1920 1131.8,1991.8 v1(1435,1991.8) ; SJ7.2@1446.5,1620 1446.5,1647.59 1450.9,1651.98 v1(1470,1651.98)
N18245623: J2.9 R195.2 | length 1049.8
  TOP w4.4: v1(1665,1489) 1685,1509 v1@1685,1720.02 ; v1@1684.99,1720.03 v1(1684.99,1727)
  BOTTOM w4.4: J2.9@960,1820 1034.8,1745.2 1666.79,1745.2 v1(1684.99,1727) ; R195.2@1665,1449 v1(1665,1489)
N18245627: J2.5 R196.2 | length 273.6
  TOP w4.4: J2.5@1160,1820 1185,1795 v1(1185,1605)
  BOTTOM w4.4: R196.2@1165,1565 1165,1585 v1(1185,1605)
N18245629: J2.3 R197.2 | length 2621.7
  BOTTOM w4.4: J2.3@1260,1820 1314.8,1765.2 2081.51,1765.2 2110.11,1736.6 2368.4,1736.6 2402.94,1702.06 2565.12,1702.06 2574.98,1692.2 2763.66,1692.2 2778.26,1677.6 2825.51,1677.6 2845.71,1697.8 3209.55,1697.8 3216.34,1704.6 3764.4,1704.6 3785,1684 R197.2@3785,1666
N18245645: J1.3 SJ10.2 | length 291.1
  TOP w4.4: v1(2084.63,1582) 2084.63,1787.13 J1.3@2117.5,1820
  BOTTOM w4.4: SJ10.2@2066.5,1550 2066.5,1563.87 v1(2084.63,1582)
N18245647: J1.1 SJ11.2 | length 301.5
  TOP w4.4: v1(2185,1580) 2222.93,1617.93 2222.93,1814.57 J1.1@2217.5,1820
  BOTTOM w4.4: v1(2185,1580) 2190,1585 SJ11.2@2226.5,1585
N18245840: J4.9 R182.2 | length 290.8
  BOTTOM w4.4: R182.2@2030,360 2055,360 2066,349 2066,224 2118.5,171.5 J4.9@2118.5,120.5
N18245857: J4.7 R181.2 | length 499.9
  BOTTOM w4.4: R181.2@1915,560 1945,560 1952.5,552.5 1952.5,442.5 1985,410 1985,154 J4.7@2018.5,120.5
N18245867: J4.5 R180.2 | length 315.6
  BOTTOM w4.4: R180.2@1915,360 1965,360 1973.2,351.8 1973.2,175.2 J4.5@1918.5,120.5
N18245871: J4.3 R186.2 | length 285.5
  BOTTOM w4.4: R186.2@1810,360 1785,360 1776.36,351.36 1776.36,162.64 J4.3@1818.5,120.5
N18245879: J4.1 R187.2 | length 547.2
  BOTTOM w4.4: J4.1@1718.5,120.5 1758,160 1758,439.7 1783.3,465 1835,465 1840,470 1840,555 1835,560 R187.2@1810,560
N18245962: J16.6 SJ12.2 | length 623.9
  TOP w4.4: J16.6@2720,20.5 2775,75.5 2775,146.36 2848.64,220 2960,220 3104.7,364.7 v1(3104.7,386.5)
  BOTTOM w4.4: v1(3104.7,386.5) SJ12.2@3138,386.5
N18246201: J4.10 SJ8.2 | length 1156.4
  TOP w4.4: v1(1183,169) 1191,169 1200,160 1545,160 1585,120 1585,66 1672,-21 2079,-21 2118.5,18.5 J4.10@2118.5,20.5
  BOTTOM w4.4: v1(1183,169) 1212.5,198.5 SJ8.2@1212.5,249
N18246203: J4.12 SJ9.2 | length 1378.7
  TOP w4.4: v1(1000,186) 1019.4,166.6 1151.6,166.6 1175,190 1205,190 1224.27,170.73 1549.27,170.73 1655,65 2175,65 2218.5,21.5 J4.12@2218.5,20.5
  BOTTOM w4.4: SJ9.2@993.5,255 993.5,192.5 v1(1000,186)
N18256242: C103.2 J17.SH1 J17.SH2 J17.SH3 J17.SH4 R193.2 | length 425
  TOP w20: -78.94,1379.22 J17.SH4@-78.94,1406.72 ; -78.94,1434.22 J17.SH4@-78.94,1406.72 ; -78.94,1719.77 J17.SH3@-78.94,1747.27 -35.44,1747.27 ; -35.44,1406.72 J17.SH4@-78.94,1406.72 ; -2.87,1406.72 J17.SH2@54.13,1406.72 ; -2.87,1747.27 J17.SH1@54.13,1747.27 111.14,1747.27 ; 54.13,1379.22 J17.SH2@54.13,1406.72 ; 111.14,1406.72 J17.SH2@54.13,1406.72
N18256939: R106.2 R107.1 U11.N8 | length 261
  TOP w8: 836.39,1318.62 839.99,1322.22 U11.N8@871.59,1322.22
  TOP w12: R107.1@664.7,1331.9 688.1,1331.9 710,1310 827.77,1310 836.39,1318.62
  TOP w15: R106.2@624.7,1331.9 R107.1@664.7,1331.9
N18262974: C102.2 J6.SH1 J6.SH2 J6.SH3 J6.SH4 R192.2 | length 608
  TOP w20: -78.94,126.58 J6.SH4@-78.94,154.08 -35.44,154.08 ; -78.94,467.13 J6.SH3@-78.94,494.63 ; -78.94,522.13 J6.SH3@-78.94,494.63 ; -35.44,494.63 J6.SH3@-78.94,494.63 ; -2.87,154.08 J6.SH2@54.13,154.08 ; -2.87,494.63 J6.SH1@54.13,494.63 ; 54.13,126.58 J6.SH2@54.13,154.08 ; 54.13,522.13 J6.SH1@54.13,494.63 ; 111.14,154.08 J6.SH2@54.13,154.08 ; 111.14,494.63 J6.SH1@54.13,494.63
  BOTTOM w20: -78.94,522.13 J6.SH3@-78.94,494.63 -35.44,494.63 ; -2.87,494.63 J6.SH1@54.13,494.63 54.13,522.13
N18269981: R48.2 U5.1 | length 447.4
  TOP w4.4: R48.2@340,465 715,465 742.13,437.87 U5.1@776.16,437.87
N18269984: R47.2 U5.2 | length 447.7
  TOP w4.4: R47.2@340,420 355,435 720,435 732.87,422.13 U5.2@776.16,422.13
N18272407: TP3.1 U1.T15 | length 268.9
  TOP w4: U1.T15@2753.11,882.2 2752.63,881.72 2752.63,838.43 2754.99,836.07
  TOP w4.4: TP3.1@2710,635 2710,655 2757.23,702.23 2757.23,833.83 2754.99,836.07
N18275227: R33.1 U3.A3 | length 69.8
  TOP w10: U3.A3@1850.75,623.62 1918.62,623.62 R33.1@1920,625
N18275826: R26.2 R28.2 U3.A2 | length 125.9
  TOP w10: U3.A2@1835,623.62 1835,642.5 1855,662.5 R26.2@1855,685 1865,695 1900,695 R28.2@1905,690
N18276397: R39.2 R44.1 U5.9 | length 121.5
  TOP w4.4: U5.9@823.62,458.54 823.62,477.93 850,504.31 R39.2@850,520 865,520 875,510 R44.1@895,510
N18276876: Q1.3 R32.2 R34.2 U3.A1 | length 186.8
  TOP w10: Q1.3@1701.73,710 1725,710 1745,690 R34.2@1765,690 1770,685 R32.2@1815,685 1815,662.5 1819.25,658.25 U3.A1@1819.25,623.62
N18278352: C40.1 R35.2 U5.4 | length 134.6
  TOP w4.4: C40.1@775,350 775,360 790.37,375.37 v1(790.37,375.46) 792.13,377.22 U5.4@792.13,401.46
  BOTTOM w4.4: R35.2@715,377 788.82,377 v1(790.37,375.46)
N18280400: R41.2 U5.11 | length 68.6
  TOP w4.4: R41.2@775,520 775,500 792.13,482.87 U5.11@792.13,458.54
N18280695: R42.2 R50.1 U5.3 | length 101.5
  TOP w4.4: R42.2@705,350 R50.1@740,350 740,355 776.38,391.38 U5.3@776.38,401.46
N18280707: R40.2 R49.1 U5.5 | length 87.3
  TOP w4.4: U5.5@807.87,401.46 807.87,382.12 810,380 R49.1@810,350 R40.2@845,350
N18282084: R38.2 R45.2 U5.7 | length 159.1
  TOP w4.4: U5.7@823.84,422.13 887.87,422.13 895,415 R45.2@915,415 R38.2@915,350
N18282089: R37.2 R43.2 U5.8 | length 138.9
  TOP w4.4: U5.8@823.84,437.87 852.87,437.87 v1(857.5,442.5) 875,460 R43.2@915,460
  BOTTOM w4.4: v1(857.5,442.5) 860,440 R37.2@860,405
N18282098: R36.2 R46.2 U5.6 | length 122.7
  TOP w4.4: U5.6@823.62,401.46 823.62,386.38 835,375 v1(860,375) 880,355 R36.2@880,350
  BOTTOM w4.4: v1(860,375) 880,355 R46.2@880,350
N18292445: L11.1 U11.N11
N18292448: C90.1 C91.1 C92.1 L11.2 U11.M9 U11.N9
N18293014: C85.1 R116.2 R189.2 | length 70
  TOP w4.4: R116.2@835,1590 C85.1@870,1590 R189.2@905,1590
N18308453: D14.C J23.9 R134.2 R135.1 | length 195.5
  TOP w4.4: J23.9@1625,1240 1625,1302.04 1645,1322.04 D14.C@1645,1341.54 1673.46,1341.54 1675,1340 R135.1@1695,1340 R134.2@1730,1340
N18311263: D10.A R108.2 | length 63.6
  TOP w4.4: R108.2@795,1650 827.72,1682.72 D10.A@845,1682.72
N18311339: D11.A R109.2 | length 43.3
  TOP w4.4: D11.A@1450,1026.65 R109.2@1450,1070
N18311378: D12.A R114.2 | length 126.8
  TOP w4.4: R114.2@795,1690 815,1710 880,1710 895,1695 D12.A@895,1682.72
N18326210: TP19.1 U9.18 | length 110.9
  TOP w4.4: U9.18@1259.25,838.01 1259.25,884.25 TP19.1@1305,930
N18326309: R68.1 U9.25 | length 144
  TOP w4.4: R68.1@1055,920 1085,890 1085,820 1096.05,808.95 U9.25@1111.99,808.95
N18326312: R67.1 U9.24 | length 96.9
  TOP w4.4: R67.1@1105,920 1105,885 1141.05,848.95 U9.24@1141.05,838.01
N18326469: TP20.1 U9.20 | length 96.2
  TOP w4.4: U9.20@1219.85,838.01 1219.85,897.65 1230,907.8 TP20.1@1230,930
N18326563: R70.2 U9.13 | length 90.2
  TOP w4.4: U9.13@1308.01,749.85 1370.15,749.85 R70.2@1390,730
N18326577: R71.2 U9.21 | length 114.5
  TOP w4.4: R71.2@1150,920 1170,920 1200.15,889.85 U9.21@1200.15,838.01
N18326609: TP21.1 U9.14 | length 102.6
  TOP w4.4: U9.14@1308.01,769.55 1368.05,769.55 1380.5,782 1381.5,782 1382.5,783 TP21.1@1405,783
N18326622: R75.2 U9.15 | length 101.4
  TOP w4.4: U9.15@1308.01,789.25 1324.25,789.25 1371,836 R75.2@1390,836
N18326681: R80.2 U9.10 | length 96.8
  TOP w4.4: U9.10@1308.01,690.75 1354.25,690.75 R80.2@1390,655
N18326713: R79.2 U9.11 | length 88.4
  TOP w4.4: U9.11@1308.01,710.45 1374.55,710.45 R79.2@1390,695
N18326873: TP22.1 U9.26 | length 204.6
  TOP w4.4: TP22.1@995,930 1070,855 1070,805 1085.75,789.25 U9.26@1111.99,789.25
N18327158: C63.1 R87.1 U9.32 | length 102.8
  TOP w4.4: R87.1@1020,645 C63.1@1055,645 1081.05,671.05 U9.32@1111.99,671.05
N18327491: R81.1 R85.1 U9.5 | length 189.7
  TOP w4.4: U9.5@1219.85,641.99 1219.85,609.85 v1(1205,595) 1220,580 R81.1@1220,565
  BOTTOM w4.4: v1(1205,595) 1230,570 R85.1@1295,570
N18331420: C65.1 R199.2 U10.3 | length 146.4
  TOP w12: U10.3@1833.07,887.79 1857.8,887.79 1868.22,898.22 v1(1880.33,898.22)
  BOTTOM w12: R199.2@1840,870 1843,870 1871.22,898.22 v1(1880.33,898.22) 1852.55,926 C65.1@1849,926
N18331439: C64.1 R97.1 R198.2 U10.5 | length 210.3
  TOP w12: R97.1@1645,875 1645,917 C64.1@1650,922 ; U10.5@1716.93,913.39 1658.61,913.39 C64.1@1650,922 ; R198.2@1720,965 1720,960 1700,940 1668,940 C64.1@1650,922
N18331754: R97.2 R103.1 U10.8 | length 127.6
  TOP w4.4: R103.1@1590,835 R97.2@1645,835 1646.61,836.61 U10.8@1716.93,836.61
N18332056: C67.1 R98.2 R102.1 | length 365.3
  BOTTOM w12: R98.2@422,240 422,203 435,190 625,190 648,213 R102.1@648,240 647,241 C67.1@647,300
N18351406: J4.11 R183.2 | length 549.8
  BOTTOM w4.4: R183.2@2030,560 2070,560 2080,550 2080,244 2203.5,120.5 J4.11@2218.5,120.5
N18387032: TP2.1 U1.T14 | length 349
  TOP w4: U1.T14@2733.43,882.2 2744.63,871 2744.63,833.73
  TOP w4.4: TP2.1@2710,575 2685,600 2685,645 2747.23,707.23 2747.23,831.13 2744.63,833.73
N18488997: D1.A R4.2 | length 2007.9
  TOP w4.4: v1(-60,1970) -80,1950 -80,1855 -15,1790 150,1790 160,1780 355,1780 375,1760 685,1760 720,1725 970,1725 v1(985,1740) ; v1(1641,1727) 1660,1708 D1.A@1660,1671.65
  BOTTOM w4.4: v1(-60,1970) R4.2@-25,1970 ; v1(985,1740) 989.8,1735.2 1632.8,1735.2 v1(1641,1727)
N18489354: D2.2 R5.1 | length 269.1
  TOP w4.4: D2.2@2631.4,1603.7 2631.4,1623.9 2637.5,1630 2695,1630 2705,1620 2705,1585 2660,1540 R5.1@2660,1470
N18489379: D2.3 R6.1 | length 157.6
  TOP w4.4: R6.1@2625,1470 2625,1530 2682.6,1587.6 D2.3@2682.6,1603.7
N18489398: D2.4 R7.1 | length 453
  TOP w4.4: R7.1@2460,1525 2460,1565.41 v2(2469.18,1574.59) ; D2.4@2682.6,1686.3 2682.6,1662.4 2715,1630 2715,1572.09 v2(2689,1546.09)
  BOTTOM w4.4: v2(2469.18,1574.59) 2476.37,1567.4 2515.09,1567.4 2540.69,1541.8 2684.71,1541.8 v2(2689,1546.09)
N18504747: C25.1 R171.2 U1.R5 | length 296.3
  TOP w8: v2(2510.83,797.5) 2512.66,799.32 2534.32,799.32 2563,828 2563,895.15 U1.R5@2556.26,901.89
  BOTTOM w15: 2491.68,778.34 v2(2510.83,797.5) 2529.17,779.16
  BOTTOM w20: R171.2@2440,770 2483.33,770 2491.68,778.34 ; 2529.17,779.16 2543.33,765 C25.1@2570,765
N18565447: J16.4 SJ13.2 | length 600.8
  TOP w4.4: J16.4@2820,20.5 2875,75.5 2875,150 2895,170 2960,170 3115,325 3180,325 v1(3200,345)
  BOTTOM w4.4: SJ13.2@3197,386.5 3197,348 v1(3200,345)
N18566301: D17.3 J27.1 R15.1 | length 109.2
  TOP w20: v1(2950,610) 2960,620 R15.1@2960,645
  BOTTOM w20: v1(3020,380) 3039.5,360.5 D17.3@3039.5,318
N18567034: D17.2 JP6.1 | length 112.6
  BOTTOM w20: JP6.1@2918,450 2918,422 2960.5,379.5 D17.2@2960.5,355
N18602883: J23.1 R188.2 | length 114.1
  TOP w4.4: J23.1@1825,1240 1825,1295 1835,1305 R188.2@1835,1350
N18782096: R154.1 Y3.1 | length 80.5
  TOP w4.4: R154.1@1046,361 1079,361 1090.6,372.6 Y3.1@1121.69,372.6
N18782104: R81.2 Y3.3 | length 82.4
  TOP w4.4: Y3.3@1208.31,447.4 1208.31,478.4 1220,490.1 R81.2@1220,525
N18785538: J8.10 R66.1 | length 261.9
  BOTTOM w4.4: J8.10@230.35,1150.04 295.31,1215 430,1215 R66.1@455,1240
N18785600: J8.12 R69.1 | length 232.6
  BOTTOM w4.4: J8.12@230.35,684.29 360.7,684.29 380,665 R69.1@455,665
N18786729: C61.1 R72.2 R74.2 R83.2 R84.2 | length 621.9
  TOP w20: C61.1@520,1280 565,1235 v1(565,1229)
  BOTTOM w20: R74.2@495,710 R72.2@495,1040 495.21,1040 570,1114.79 R84.2@570,1120 R83.2@570,1160 570,1224 v1(565,1229)
N18786733: R76.2 R77.2 R83.1 | length 80
  BOTTOM w20: R76.2@495,1205 R77.2@495,1160 R83.1@530,1160
N18786737: R73.2 R78.2 R84.1 | length 75
  BOTTOM w20: R73.2@495,1080 R78.2@495,1120 R84.1@530,1120
N179915740: D5.A R24.2 | length 921.4
  TOP w4.4: R24.2@2090,255 2360.86,255 2378.26,272.4 2522.6,272.4 2595,200 2760,200 2815,255 2910,255 2920,265 D5.A@2920,292.28
OPAMP0_INN/RSHUNT_CURA_N: R186.1 U1.U6 | length 1157.4
  TOP w4: 2421.5,783.5 2538.5,783.5 2575.94,820.94 U1.U6@2575.94,862.52
  TOP w4.4: v1(2080,785.7) 2083.85,785.7 2098.25,771.3 2301.3,771.3 2314,784 2421,784 2421.5,783.5
  BOTTOM w4.4: R186.1@1810,420 1830,420 1850,440 1850,706 1927.94,783.94 2006.06,783.94 2025,765 2059.3,765 v1(2080,785.7)
OPAMP1_INN/RSHUNT_CURB_N: R181.1 U1.U8 | length 858.1
  TOP w4: 2479.5,744.5 2559.5,744.5 2615.31,800.31 U1.U8@2615.31,862.52
  TOP w4.4: v1(1967.5,695) 1969.3,696.8 2067.34,696.8 2076.64,687.5 2422.5,687.5 2479.5,744.5
  BOTTOM w4.4: R181.1@1915,620 1915,642.5 v1(1967.5,695)
OPAMP2_INN/RSHUNT_CURC_N: R183.1 U1.U10 | length 791
  TOP w4: U1.U10@2654.69,862.52 2656.69,860.52 2656.69,803.69
  TOP w4.4: v1(2040,655) 2042.5,657.5 2499.5,657.5 2546.7,704.7 2581.41,704.7 2656.69,779.98 2656.69,803.69
  BOTTOM w4.4: R183.1@2030,620 2030,645 v1(2040,655)
P0_0/TMS/SWD_DIO: D16.6 J23.2 R129.2 R144.2 U1.A17 | length 2813.5
  TOP w4: U1.A17@2792.48,1177.48 2792.48,1202.36 2810.55,1220.43
  TOP w4.4: R129.2@1255,1280 v1(1284.5,1280) ; v1(1780,1490) 1815,1490 1865,1440 v1(1865,1365) 1865,1305 1860,1300 1860,1200 1850,1190 J23.2@1825,1190 1825,1146.5 1802.72,1124.22 D16.6@1802.72,1065.59 1824.41,1065.59 1840,1050 R144.2@1860,1050 ; 2810.55,1220.43 2920.49,1330.37 2920.49,1404.9 v2(2922.37,1406.78)
  BOTTOM w4.4: v1(1284.5,1280) 1285,1280 1315,1310 1325,1310 1345,1330 1345,1365 1405,1425 1509.93,1425 1578.13,1356.8 1816.8,1356.8 1825,1365 v1(1865,1365) ; v1(1780,1490) 1782.5,1487.5 1884.68,1487.5 1927.5,1444.68 2219.37,1444.68 2241.15,1422.9 2397.36,1422.9 2418.48,1401.78 2448.84,1401.78 2464.69,1385.93 2666.03,1385.93 2701.96,1350 2755.2,1350 2769.31,1364.11 2784.2,1364.11 2820.09,1400 2915.59,1400 v2(2922.37,1406.78)
P0_1/TCLK/SWD_CLK: D16.5 J22.2 J23.4 R147.1 U1.A16 | length 3085.6
  TOP w4: U1.A16@2772.8,1177.48 2772.8,1189.51 2775,1191.71
  TOP w4.4: J23.4@1775,1190 1775,1045 1780,1040 D16.5@1802.72,1040 1815,1040 1840,1015 R147.1@1860,1015 1865,1015 1883.2,1033.2 1883.2,1516.8 v1(1875,1525) ; 2775,1191.71 2775,1199.03 2886.59,1310.61 v2(2886.59,1446.2)
  BOTTOM w4.4: J22.2@1055,1070 1140,985 1484,985 1507,1008 1507,1112 1537.5,1142.5 1757.5,1142.5 1775,1160 J23.4@1775,1190 ; v1(1875,1525) 1875.46,1525 1935.79,1464.68 2227.66,1464.68 2248.15,1444.18 2448.87,1444.18 2477.12,1415.93 2569.75,1415.93 2592.15,1438.33 2786.39,1438.33 2810.46,1462.4 2870.45,1462.4 2886.59,1446.27 v2(2886.59,1446.2)
P0_2/TDO/SWO: D16.4 J23.6 R130.2 U1.B16 | length 2981.2
  TOP w4: 2765,1195.86 2761.11,1191.97 2761.11,1169.49 U1.B16@2772.8,1157.8
  TOP w4.4: R130.2@1360,1525 1380,1525 v1(1395,1540) ; v1(1620,1535.4) 1610.4,1525.8 1610.4,1440.69 1573.2,1403.49 1573.2,1001.8 1595,980 1660,980 1670,990 1792.72,990 1802.72,1000 D16.4@1802.72,1014.41 1760.59,1014.41 1755,1020 1755,1085 1725,1115 J23.6@1725,1190 ; 2765,1195.86 2765,1203.17 2863.74,1301.91 v2(2863.74,1446.2)
  BOTTOM w4.4: v1(1395,1540) 1406.8,1551.8 1502.03,1551.8 1526.63,1527.2 1611.8,1527.2 v1(1620,1535.4) 1796.24,1535.4 1831.64,1500 1886.32,1500 1931.64,1454.68 2223.51,1454.68 2244.01,1434.18 2444.72,1434.18 2472.97,1405.93 2573.89,1405.93 2596.29,1428.33 2790.54,1428.33 2808.41,1446.2 v2(2863.74,1446.2)
P0_3/CMP1_IN1-MC_CUR_DCB: D16.3 J23.8 R131.2 R145.2 R195.1 U1.B15 | length 3316.7
  TOP w4: U1.B15@2753.11,1157.8 2753.11,1195.28 2755,1197.17 2755,1207.31
  TOP w4.4: R131.2@1255,1605 v1(1255,1645) ; v1(1618,1605) 1643.2,1579.8 1643.2,1523.2 1628.6,1508.6 v1(1628.6,1489) 1628.6,1444.74 1583.2,1399.34 1583.2,1016.8 1605,995 1650,995 1660,1005 R145.2@1660,1015 1680,1015 1680.59,1014.41 D16.3@1717.28,1014.41 1739.78,1014.41 1745,1019.63 1745,1070.98 1675,1140.98 J23.8@1675,1190 ; 2755,1207.31 2846.2,1298.51 2846.2,1559.4 v1(2880,1593.2)
  BOTTOM w4.4: v1(1255,1645) 1260,1650 1295,1650 1305,1640 1395,1640 1440.2,1594.8 1607.8,1594.8 v1(1618,1605) 1627.2,1614.2 1764.2,1614.2 1805,1655 1995.86,1655 2030.66,1620.2 2176.91,1620.2 2188.91,1632.2 2323.05,1632.2 2343.19,1612.06 2482.91,1612.06 2497.57,1597.4 2527.52,1597.4 2553.12,1571.8 2663.51,1571.8 2676.71,1585 2871.8,1585 v1(2880,1593.2) ; R195.1@1605,1449 1605,1466.4 1627.6,1489 v1(1628.6,1489)
P0_4/EZH_CAMERA_VSYNC: J11.17 R180.3 SJ12.3 U1.B14 | length 4428.8
  TOP w4: U1.B14@2733.43,1157.8 2745,1169.37 2745,1211.46 2751.67,1218.13
  TOP w4.4: v1(2100,715.7) 2108.2,707.5 2367.5,707.5 v2(2375,715) ; 2751.67,1218.13 2836.2,1302.66 2836.2,1716.2 v2(2905,1785) ; v1(3103.2,463) 3103.2,465 3095,473.2 3095,675 3120,700 3173.29,700 3340.4,867.11 3340.4,1247.89 3316.8,1271.49 3316.8,1408.2 3293.34,1431.66 3293.34,1544.8 3260,1578.14 3260,1690 3165,1785 J11.17@3165,1820
  BOTTOM w4.4: R180.3@1915,300 1888,300 1882,306 1882,396 1860,418 1860,698.24 1935.7,773.94 1993.51,773.94 2017.44,750 2075,750 2100,725 v1(2100,715.7) ; v2(2375,715) 2375.09,715 2550.09,540 2659,540 2704,495 3071.2,495 v1(3103.2,463) 3103.7,463.5 SJ12.3@3138,463.5 ; v2(2905,1785) 2909,1781 3106,1781 3145,1820 J11.17@3165,1820
P0_5/EZH_CAMERA_PCLK: J11.15 R181.3 SJ13.3 U1.A14 | length 3930.6
  TOP w4: U1.A14@2733.43,1177.48 2734.5,1178.55 2734.5,1194.5
  TOP w4.4: v1(2020,725) 2038.2,706.8 2071.49,706.8 2080.79,697.5 2380.5,697.5 v2(2398,715) ; 2734.5,1194.5 2735.2,1195.2 2735.2,1215.8 2821.2,1301.8 2821.2,1375.8 v2(2820,1377) ; v1(3155,505) 3200,550 3200,636.21 3381.2,817.41 3381.2,1358.8 v2(3364.8,1375.2) 3364.8,1376.8 3380.34,1392.34 3380.34,1544.66 3365,1560 3365,1720 J11.15@3265,1820
  BOTTOM w4.4: R181.3@1915,500 1895,500 1880,515 1880,663.24 1964.26,747.5 1997.5,747.5 v1(2020,725) ; v2(2398,715) 2398,714.09 2562.09,550 2664,550 2709,505 v1(3155,505) 3196.5,463.5 SJ13.3@3197,463.5 ; v2(2820,1377) 2822,1377 2828,1383 3297,1383 3304.8,1375.2 v2(3364.8,1375.2)
P0_6/ISPMODE_N-DEBUG: C3.1 D15.C J23.7 R1.2 R133.2 SW1.3 SW1.4 U1.C14 | length 5673.8
  TOP w4: 2725.2,1205.7 2725.2,1190.2 2722.73,1187.73 2722.73,1148.81 U1.C14@2733.43,1138.11
  TOP w4.4: R133.2@1450,1225 1469.7,1244.7 1469.7,1314.7 1480,1325 1480,1520 v1(1490,1530) ; J23.7@1675,1240 1675,1295 1680,1300 1767.66,1300 1785,1317.34 D15.C@1785,1341.54 1761.8,1341.54 1755,1348.34 1755,1480 v1(1745,1490) ; 2725.2,1205.7 2725.2,1219.94 2805,1299.74 v2(2805,1353.94) ; SW1.4@4142.68,-39.05 SW1.3@4142.68,124.33 4142.68,162.32 4130,175 C3.1@4130,205 R1.2@4130,250 v1(4170,250)
  BOTTOM w4.4: v1(1490,1530) 1509.69,1530 1522.49,1517.2 1717.8,1517.2 v1(1745,1490) 1763.7,1471.3 1886.73,1471.3 1923.36,1434.68 2215.22,1434.68 2237,1412.9 2393.22,1412.9 2414.34,1391.78 2444.7,1391.78 2460.54,1375.93 2661.88,1375.93 2697.81,1340 2759.34,1340 2773.29,1353.94 v2(2805,1353.94) 2823.23,1353.94 2842.28,1373 3292,1373 3306,1359 3444.24,1359 3499.94,1414.7 3980.3,1414.7 4011,1384 4116,1384 4140,1360 4295,1360 4325,1330 4325,1285 4340,1270 4395,1270 4430,1235 4430,1050 4420,1040 4420,275 4395,250 v1(4170,250)
P0_7/FXIO_LCD_DC: J12.8 U1.C13 | length 1798.6
  TOP w4: U1.C13@2713.74,1138.11 2714.73,1139.1 2714.73,1223.62 2722.23,1231.12
  TOP w4.4: 2722.23,1231.12 2780,1288.89 v2(2780,1337.74)
  BOTTOM w4.4: v2(2780,1337.74) 2786.2,1331.55 2814.97,1331.55 2846.43,1363 3287.86,1363 3301.86,1349 3448.39,1349 3504.09,1404.7 3968.59,1404.7 4012.73,1360.55 4114.45,1360.55 4159.76,1315.24 J12.8@4270,1315.24